# Altium PCB PCB.PcbDoc
Units mil, origin at the board's own origin, x right, y up, seen from the top; angles counter-clockwise.
Board outline 1840 x 1985 mil, 2 copper layers (Top Layer, Bottom Layer); 19 components, 10 nets, 42 pads, 0 vias.
Unrouted connection lines stored in the file: 13.
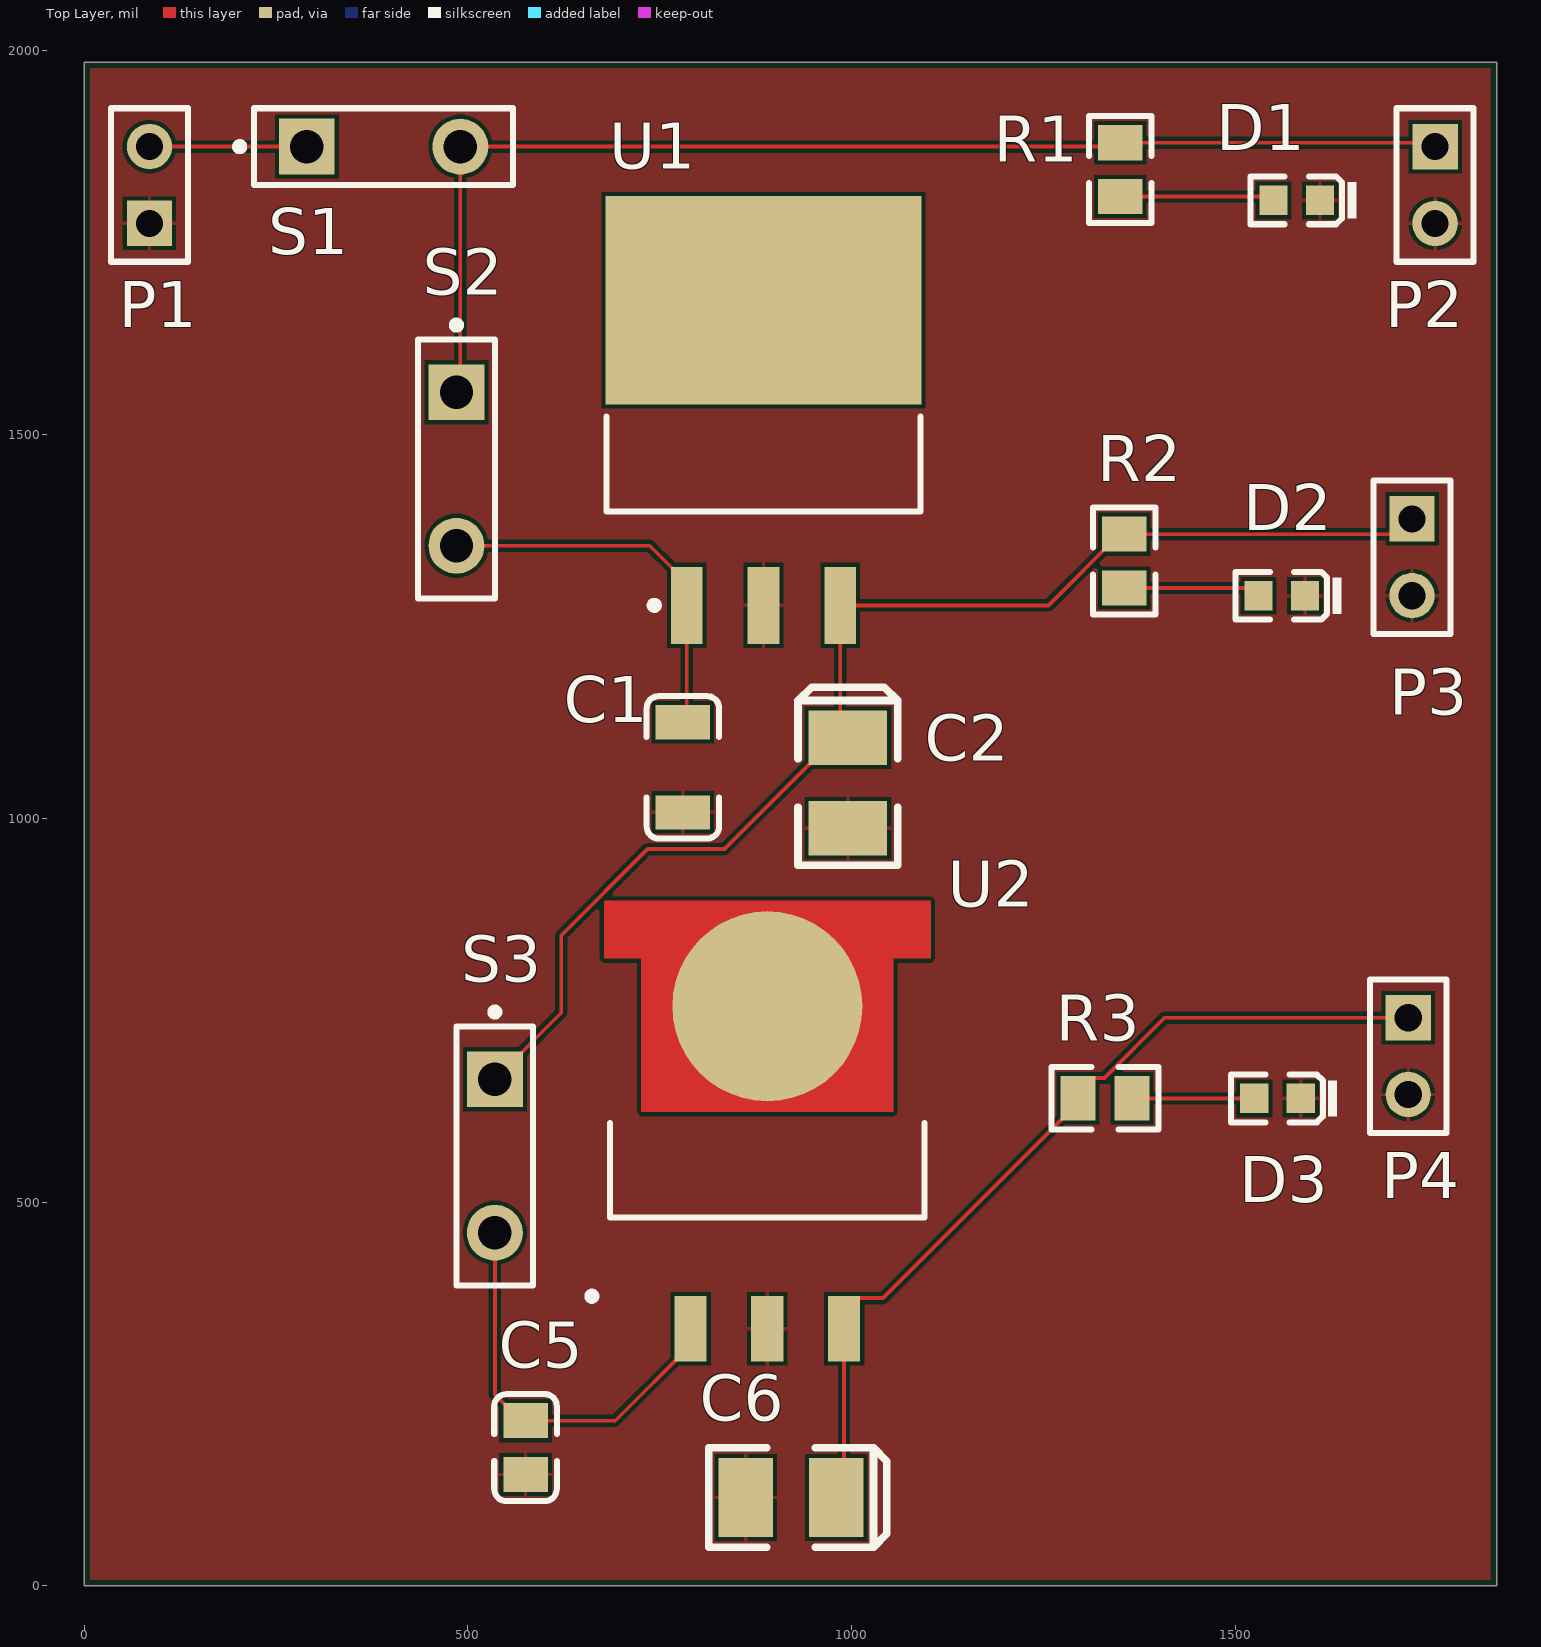
[diagram p0: Top Layer view]
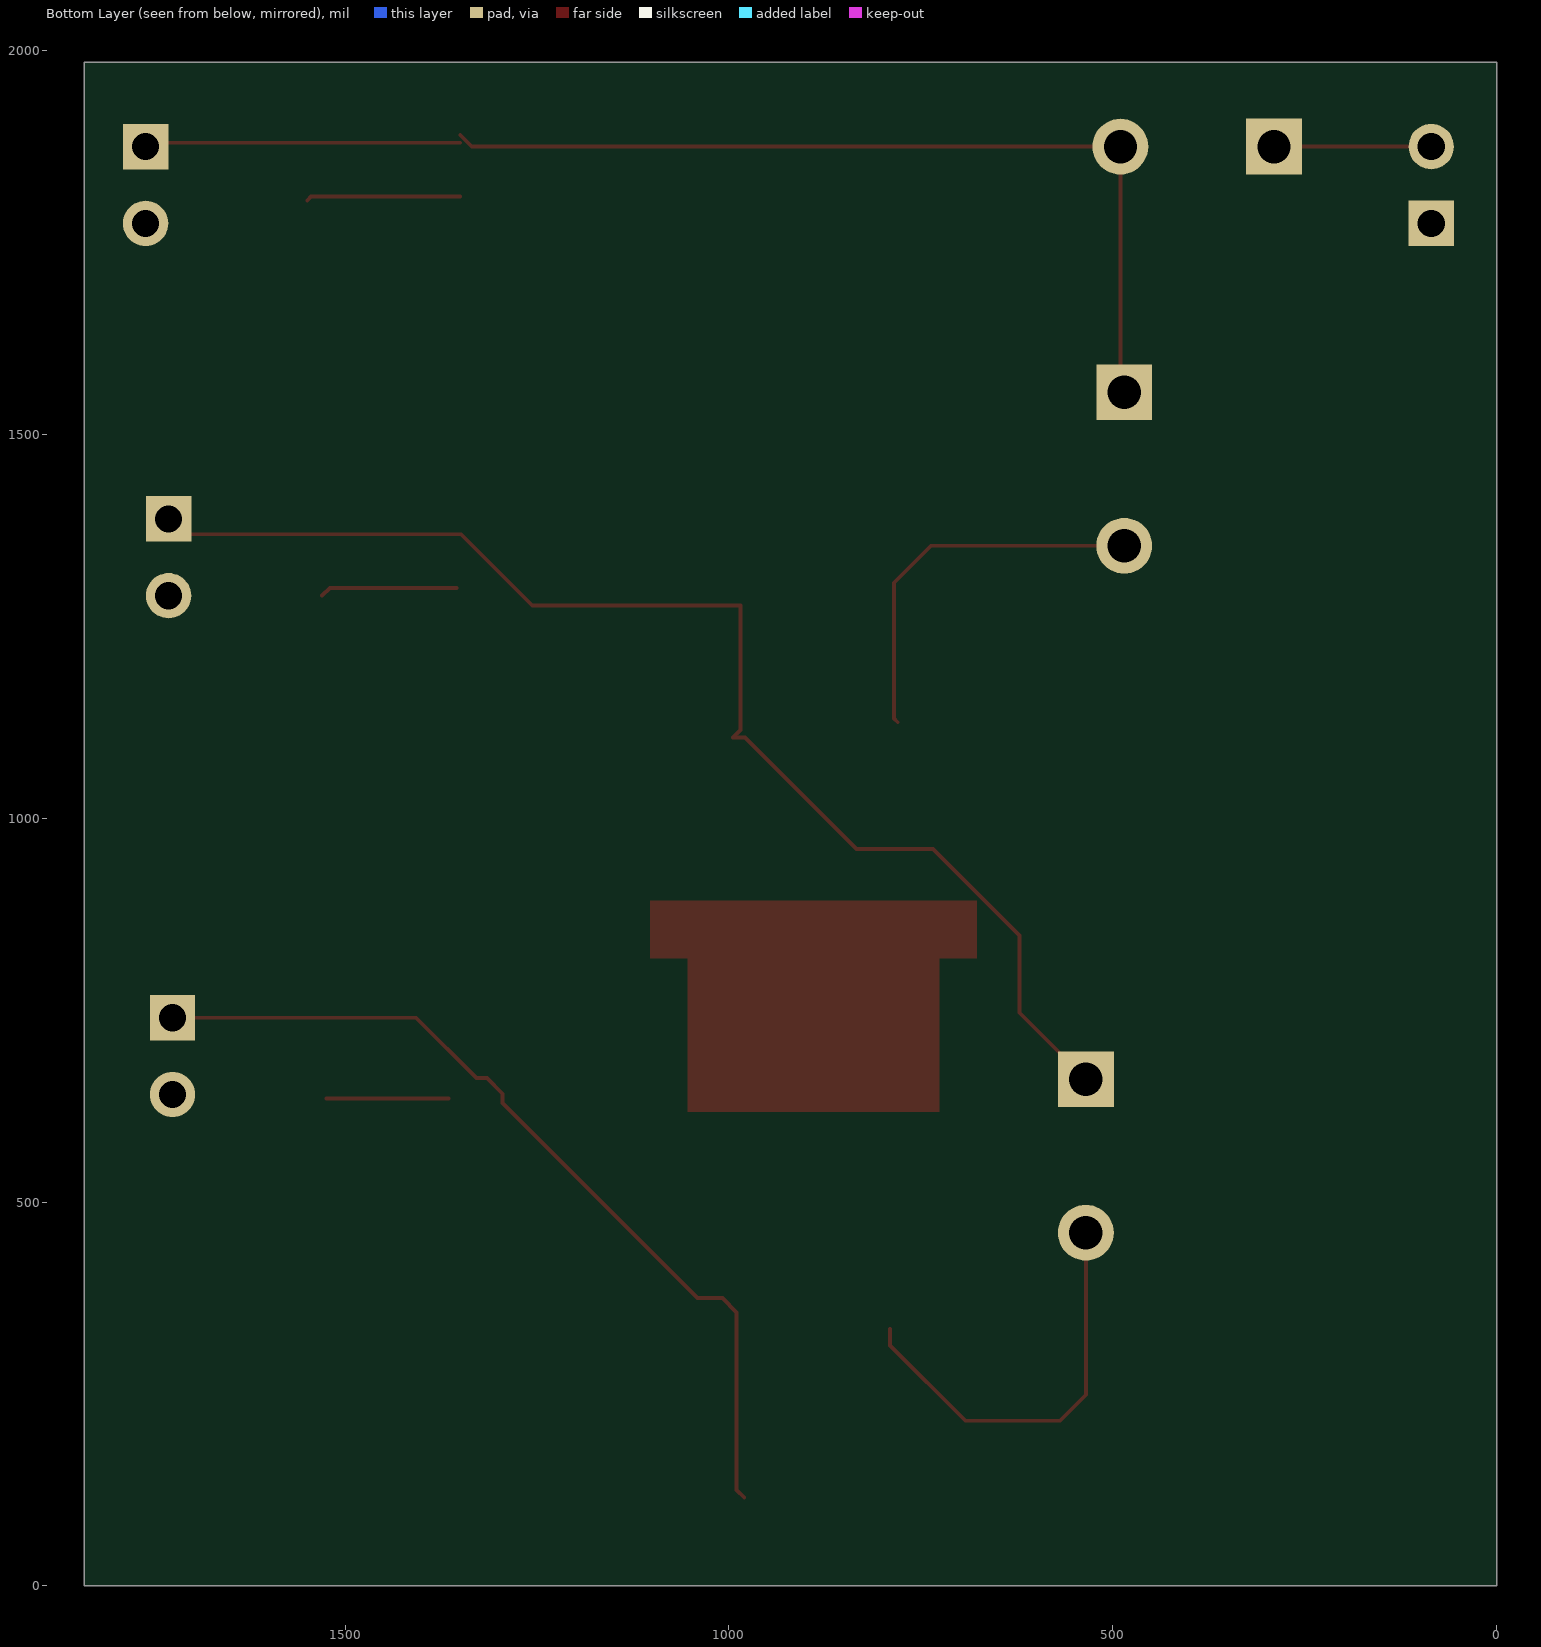
[diagram p1: Bottom Layer view, seen from below]
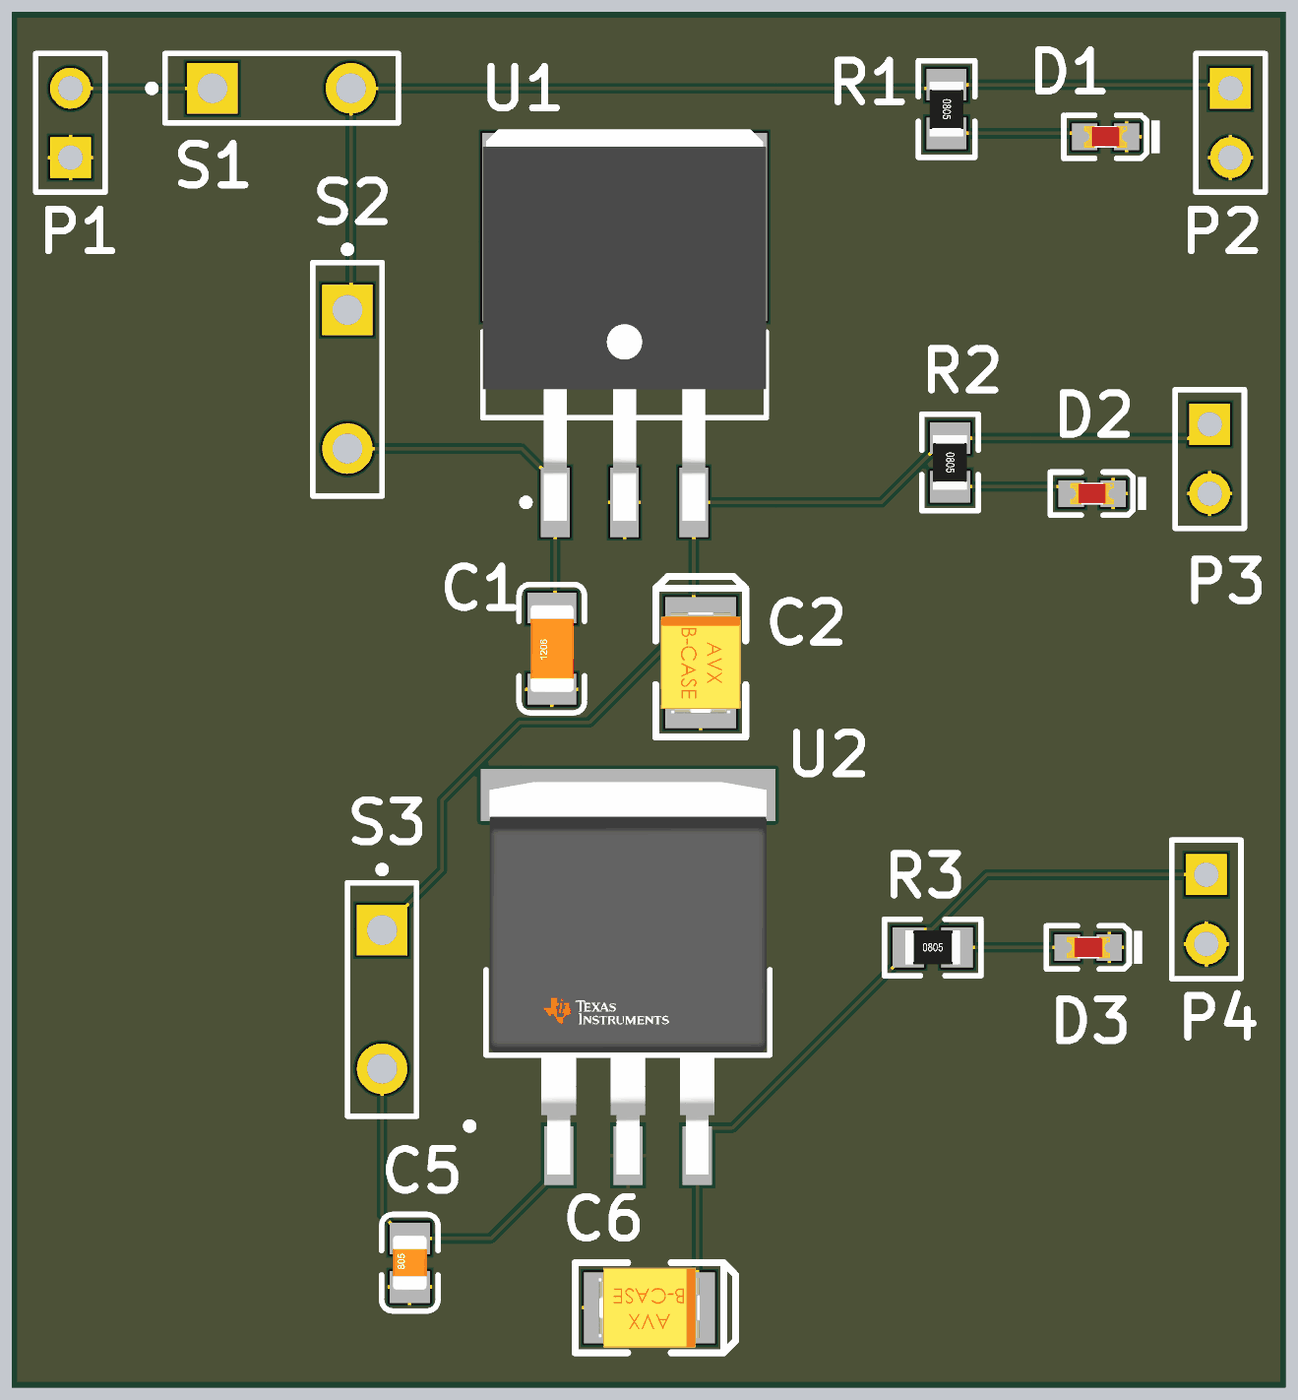
[diagram p2: 3D render of the assembled board from above, using the file's embedded part models]

## Layer stack, top to bottom
Top Solder: solder mask 0.4, Solder Resist, Dk 3.5
Top Layer: signal copper 1.4
Dielectric 1: dielectric 12.6, FR-4, Dk 4.8
Bottom Layer: signal copper 1.4
Bottom Solder: solder mask 0.4, Solder Resist, Dk 3.5

## Board outline
0,0 1840,0 1840,1985 0,1985

## Design rules (kind name [scope] priority, off if disabled: settings)
BoardOutlineClearance [All] p1: gap=7.87 ignorepadtopadclearanceinfootprint=FALSE
Clearance [All] p1: gap=5 ignorepadtopadclearanceinfootprint=FALSE except(9.84: Arc-Hole Track-Hole SMDPad-Hole THPad-Hole Via-Hole Fill-Hole Poly-Hole Region-Hole Text-Hole)
ComponentClearance [All] p1: gap=5 collisioncheckmode=3 verticalgap=5 showdistances=TRUE
DiffPairsRouting [All] p1: maxlimit=10 minlimit=5 mostfreqgap=5 toplayer_minwidth=5 toplayer_maxwidth=1000 toplayer_prefwidth=5 bottomlayer_minwidth=5 bottomlayer_maxwidth=1000 bottomlayer_prefwidth=5 maxuncoupledlength=500
Height [All] p1: minheight=0 maxheight=71497.94 prefheight=500
HoleSize [All] p1: absolutevalues=TRUE maxlimit=248.03 minlimit=11.81 maxpercent=80.000 minpercent=20.000
HoleToHoleClearance [All] p1: gap=9.84 allowstackedmicrovias=FALSE
MinimumAnnularRing [All] p1: minimumring=3
MinimumSolderMaskSliver [All] p1: minsoldermaskwidth=0
PlaneClearance [All] p1: clearance=5
PlaneConnect PlaneConnectPowerPads [InPadClass('PowerPads')] p1: planeconnectstyle=Direct reliefexpansion=20 reliefentries=4 reliefconductorwidth=10 reliefairgap=10
PlaneConnect [All] p2: pad.planeconnectstyle=Relief pad.reliefexpansion=11.81 pad.reliefentries=4 pad.reliefconductorwidth=5 pad.reliefairgap=5 via.planeconnectstyle=Direct via.reliefexpansion=11.81 via.reliefentries=4 via.reliefconductorwidth=5 via.reliefairgap=5
PolygonConnect PolygonConnectPowerPads [All vs (InPadClass('PowerPads'))] p1: connectstyle=Direct reliefconductorwidth=10 reliefentries=4 polygonreliefangle="90 Angle" airgapwidth=10
PolygonConnect [All] p2: thpad.connectstyle=Relief thpad.reliefconductorwidth=5 thpad.reliefentries=4 thpad.polygonreliefangle="90 Angle" thpad.airgapwidth=5 smdpad.connectstyle=Relief smdpad.reliefconductorwidth=5 smdpad.reliefentries=4 smdpad.polygonreliefangle="90 Angle" smdpad.airgapwidth=5 via.connectstyle=Direct via.reliefconductorwidth=5 via.reliefentries=4 via.polygonreliefangle="90 Angle" via.airgapwidth=5
RoutingVias [All] p1: holewidth=11.81 width=23.62 viastyle="Through Hole" minholewidth=11.81 minwidth=23.62 maxholewidth=23.62 maxwidth=259.84
SilkToSilkClearance [All] p1: silktosilkclearance=0
SilkToSolderMaskClearance [IsPad] p1: minsilkscreentomaskgap=5 clearancetoexposedcopper=TRUE
SolderMaskExpansion [All] p1: expansion=2.95 istentingtop=FALSE
Width [All] p1: maxlimit=1000 minlimit=5 preferedwidth=5 minimp=50.000000 maximp=50.000000 favimp=50.000000
20 further rules are at their usual default settings.

## Components (designator, comment, footprint, x,y, rotation, side; value= is the part's Value field where it differs from the comment)
C1 "470nF" 1206_C 780,1066.34 r90 top
C2 "100uF" CASE-B_3528 995,1045.94 r90 top
C5 "470nF" 0805_C 575,180.04 r90 top
C6 "100uF" CASE-B_3528 920.94,115 r0 top
D1 "0603 Blue" 0603_LED_S1 1579.69,1805 r180 top
D2 "0603 Blue" 0603_LED_S1 1560.32,1290 r180 top
D3 "0603 Blue" 0603_LED_S1 1554.69,635 r180 top
P1 "Header 2" HDR1X2 85,1775 r90 top
P2 "Header 2" HDR1X2 1760,1875 r270 top
P3 "Header 2" HDR1X2 1730,1390 r270 top
P4 "Header 2" HDR1X2 1725,740 r270 top
R1 "12KΩ ±1%" 0805_R 1350,1845.04 r270 top
R2 "5KΩ ±1%" 0805_R 1355,1335.04 r270 top
R3 "3KΩ ±1%" 0805_R 1329.96,635 r0 top
S1 "12V Switch" SPST-2 390,1875 r0 top
S2 "5V Switch" SPST-2 485,1455 r270 top
S3 "3.3V Switch" SPST-2 535,560 r270 top
U1 "LM2940CSX-5.0" KTT0003B_L 885,1519.49 r90 top
U2 "LM3940ISX-3.3/NOPB" FP-KTT0003B-MFG 890,592.4 r0 top

## Footprints (in the part's own frame and the unit in brackets; to place one, negate y for a bottom-side part, rotate by r counter-clockwise, add the part's x,y. Pads: shape width x height; smd on the part's side, far side on the other; paste and mask are expansions set on the pad)
0603_LED_S1 [mm]
  rect 0.93x0.98 smd: A(0.77,0) K(-0.77,0)
  silkscreen extent -1.98,-0.79 1.54,0.79, body extent -0.8,-0.4 0.8,0.4, height 0.6
0805_C [mm]
  rect 1.16x1.47 smd: 1(-0.89,0) 2(0.89,0)
  silkscreen extent -1.77,-1.04 1.77,1.04, body extent -1,-0.62 1,0.63, height 0.77
0805_R [mm]
  rect 1.16x1.47 smd: 1(-0.89,0) 2(0.89,0)
  silkscreen extent -1.77,-1.04 1.77,1.03, body extent -1,-0.62 1,0.63, height 0.49
1206_C [mm]
  rect 1.13x1.8 smd: 1(-1.49,0) 2(1.49,0)
  silkscreen extent -2.36,-1.2 2.35,1.2, body extent -1.6,-0.81 1.6,0.79, height 1
CASE-B_3528 [mm]
  rect 1.8x2.6 smd: 1(1.5,0) 2(-1.5,0)
  silkscreen extent -2.73,-1.65 3.16,1.65, body extent -1.85,-1.47 1.85,1.46, height 2.03
FP-KTT0003B-MFG [mm]
  rect 1.07x2.16 smd paste+0 mask+0: 1(-2.54,-6.545) 2(0,-6.545) 3(2.54,-6.545)
  round 6.291 smd paste+0 mask+0: 4(0,4.13)
  Top Layer region: 5.4,7.625 -5.4,7.625 -5.4,5.715 -4.165,5.715 -4.165,0.635 4.165,0.635 4.165,5.715 5.4,5.715 5.4,7.625
  silkscreen extent -5.93,-5.59 5.21,0.26, body extent -5.5,-7.73 5.5,7.73, height 0.25
HDR1X2 [mm] "Connector; Header; 2 Position"
  rect 1.5x1.5 hole 0.9: 1(0,0)
  round 1.5 hole 0.9: 2(2.54,0)
  silkscreen extent -1.27,-1.27 3.81,1.27
KTT0003B_L [mm] "D2-PAK, 3-Leads, Body 10.41x8.89mm, Pitch 2.54mm, IPC High Density"
  rect 2.55x1.05 smd: 1(-6.15,2.54) 2(-6.15,0) 3(-6.15,-2.54)
  rect 6.9x10.45 smd: 4(3.95,0)
  silkscreen extent -6.27,-5.2 0.1,5.2, body extent -6.83,-5.2 7.52,5.2, height 4.64
SPST-2 [mm] "Switch; 2 Leads"
  rect 1.85x1.85 hole 1.1: 1(-2.54,0)
  round 1.85 hole 1.1: 2(2.54,0)
  silkscreen extent -4.89,-1.27 4.28,1.27

## Part data
C1: library part "1206 470nF (474) 10% 50V", "Chip capacitors", Manufacturer="Guangdong Fenghua Advanced Tech", Package=1206, PartNumber=1206B474K500NT, SuppliersPartNumber=C1871, Tolerance=10%, Voltage=50V, Capacitance=470nF, ComponentLink1Description="Supplier link", ComponentLink1URL=http://www.szlcsc.com/product/details_2223.html, Supplier=LC
C2 C6: library part "3528 100uF (107) 10% 6.3V", "Tantalum capacitor", Manufacturer=AVX, Package=3528, PartNumber=TAJB107K006RNJ, SuppliersPartNumber=C16133, Tolerance=10%, Voltage=6.3V, Capacitance=100uF, ComponentLink1Description="Supplier link", ComponentLink1URL=http://www.szlcsc.com/product/details_16815.html, Supplier=LC
C5: library part "0805 470nF (474) 10% 50V", "Chip capacitors", Manufacturer="Samsung Electro-Mechanics", Package=0805, PartNumber=CL21B474KBFNNNE, SuppliersPartNumber=C13967, Tolerance=10%, Voltage=50V, Capacitance=470nF, ComponentLink1Description="Supplier link", ComponentLink1URL=http://www.szlcsc.com/product/details_14623.html, Supplier=LC
D1 D2 D3: library part "0603 LED Blue", "LED", Color=Blue, Package=0603, SuppliersPartNumber=C72041, ComponentLink1Description=供应商链接, ComponentLink1URL=http://www.szlcsc.com/product/details_73150.html, Supplier=LC
P1 P2 P3 P4: "Header, 2-Pin", LatestRevisionDate=17-Jul-2002, LatestRevisionNote="Re-released for DXP Platform.", Publisher="Altium Limited"
R1 R2 R3: library part "0805 1M (1004) 1%", "Chip resistor", Manufacturer="Uniroyal Elec", Package=0805, Power=1/8W, SuppliersPartNumber=C17514, Tolerance=1%, ComponentLink1Description="Supplier link", ComponentLink1URL=http://www.szlcsc.com/product/details_18202.html, Supplier=LC
S1 S2 S3: library part SW-PB, "Switch", LatestRevisionDate=17-Jul-2002, LatestRevisionNote="Re-released for DXP Platform.", PackageDescription="Switch; 2 Leads", PackageReference=SPST-2, Published=24-Mar-1999, Publisher="Altium Limited"
U1: library part CMP-0062-00571-4, "1A Low Dropout Regulator, 3-pin TO-263", Manufacturer="Texas Instruments", PackageTopMarking="NSUZXYTTE#*LM2940CS*-5.0 P+", PowerWise=N, Code_JEDEC=MO-169-AA, ComponentLink1Description="Datasheet URL", ComponentLink1URL=http://www.ti.com/general/docs/lit/getliterature.tsp?genericPartNumber=LM2940C&fileType=pdf, CompType="LDO IC", PackageDescription="TO-263, Molded, .400 x .390 x .180in, 3 Lead, .1in Pitch, Surface Mount", PackageReference=KTT0003B, PinCount=3, RoHS=N
U2: library part CMP-04917-000003-1, "IC REG LIN 3.3V 1A DDPAK/TO263-3", Dropout Voltage=0.5V, Manufacturer="Texas Instruments", Max Junction Temp=+125°C, Max Supply Voltage=5.5V, Min Supply Voltage=4.5V, Nominal Supply Current=10-110mA, Output Current=1A, Output Voltage=3.3V, Package=KTT0003B, Temperature="-40°C to +125°C", Temperature Range Low=-40°C, Accuracy Percentage=2.5%, Automotive=No, Category=IC, ComponentLink2Description=Datasheet, ComponentLink2URL=http://www.ti.com/lit/ds/symlink/lm3940.pdf, Device Class L1="Integrated Circuits (ICs)", Device Class L2="Power Management ICs", Device Class L3="Voltage Regulators - Linear", Digikey Description="IC REG LIN 3.3V 1A DDPAK/TO263-3", Height=4.79mm, Lead Free=Yes, Manufacturer Part Number=LM3940ISX-3.3/NOPB, Mouser Description="LDO Voltage Regulators 1A LDO REG", Number Of Outputs=1, Octopart=https://octopart.com/lm3940isx-3.3%2Fnopb-texas+instruments-24814218, Output Type=Fixed, RoHS=TRUE, Standoff Height=0mm, Temperature Range High=+125°C

## Nets (pads, with @x,y where several pads share a name; then routed paths per layer and width w, separated by ;. In a path a pad name is that pad's centre, name@x,y a point inside that pad or via, vN(x,y) a via of type N, cw(c..) or ccw(c..) an arc to the next point about the centre after c; other vN are vias at no path point)
GND: C1.1 C2.2 C5.1 C6.2 D1.K D2.K D3.K P1.1 P2.2 P3.2 P4.2 U1.2 U2.2 U2.4
NetC1_2: C1.2 S2.2 U1.1 | length 503.9
  Top Layer w5: S2.2 736.89,1355 785,1306.89 U1.1 785,1130 C1.2
NetC2_1: C2.1 P3.1 R2.1 S3.1 U1.3 | length 1671.5
  Top Layer w5: S3.1 621.61,746.61 621.61,847.41 733.93,959.74 833.99,959.74 979.25,1105 C2.1 985,1115 U1.3 1256.18,1277.36 1348.9,1370.08 R2.1 1710.08,1370.08 P3.1
NetC5_2: C5.2 S3.2 U2.1 | length 542.2
  Top Layer w5: S3.2 535,248.98 568.9,215.08 C5.2 691.81,215.08 790,313.27 U2.1
NetC6_1: C6.1 P4.1 R3.1 U2.3 | length 1146.5
  Top Layer w5: C6.1 990,125 U2.3 990,356.18 1008.56,374.74 1040.77,374.74 1294.92,628.9 R3.1 1294.92,641.1 1315.26,661.44 1329.06,661.44 1407.62,740 P4.1
NetD1_A: D1.A R1.2 | length 201.4
  Top Layer w5: R1.2 1544.37,1810 D1.A
NetD2_A: D2.A R2.2 | length 179.1
  Top Layer w5: R2.2 1520,1300 D2.A
NetD3_A: D3.A R3.2 | length 159.4
  Top Layer w5: R3.2 D3.A
NetP1_2: P1.2 S1.1 | length 205
  Top Layer w5: P1.2 S1.1
NetP2_1: P2.1 R1.1 S1.2 S2.1 | length 1600.4
  Top Layer w5: S2.1 490,1560 S1.2 1335,1875 R1.1@1350,1890 ; R1.1 1754.92,1880.08 P2.1
pads on no net: U1.4

## Polygon pours and split planes (outlines as drawn)
GND on Top Layer "GND_L01_P000" (solid, pour order 0): 0,0 1840,0 1840,1990 1835,1985 0,1985